# EAGLE board blmc_laurent (EAGLE 4.16)
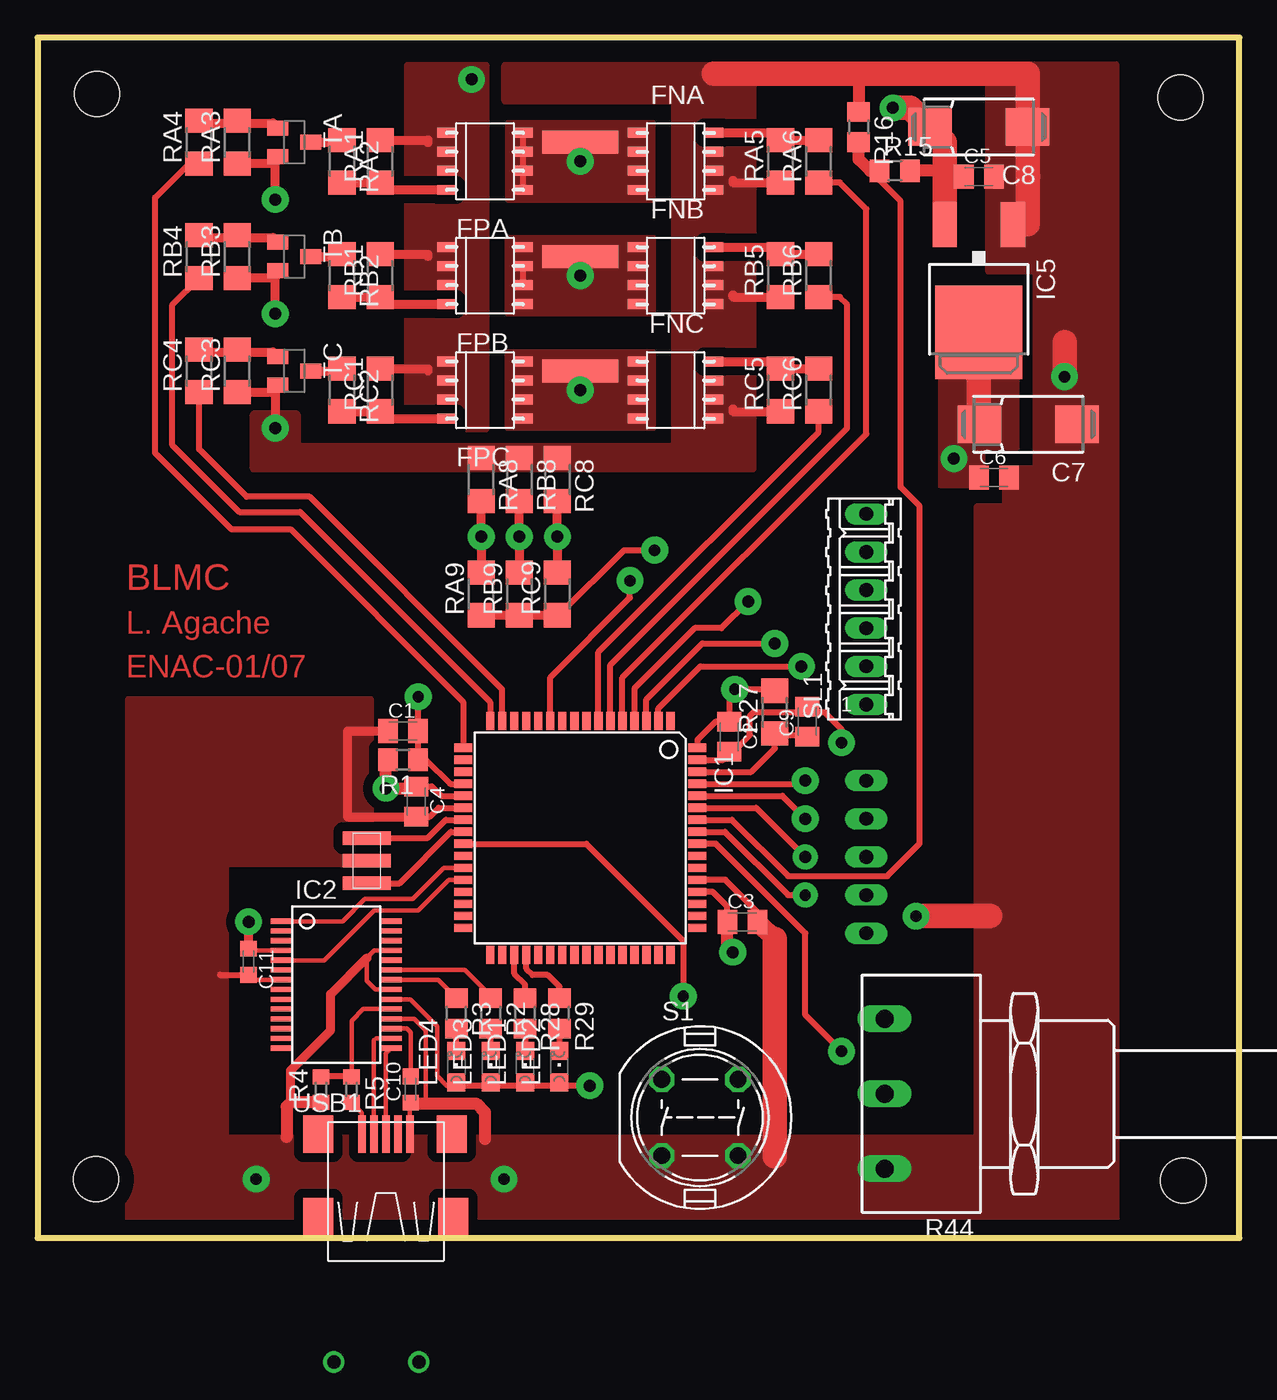
[diagram p0: board, top side]
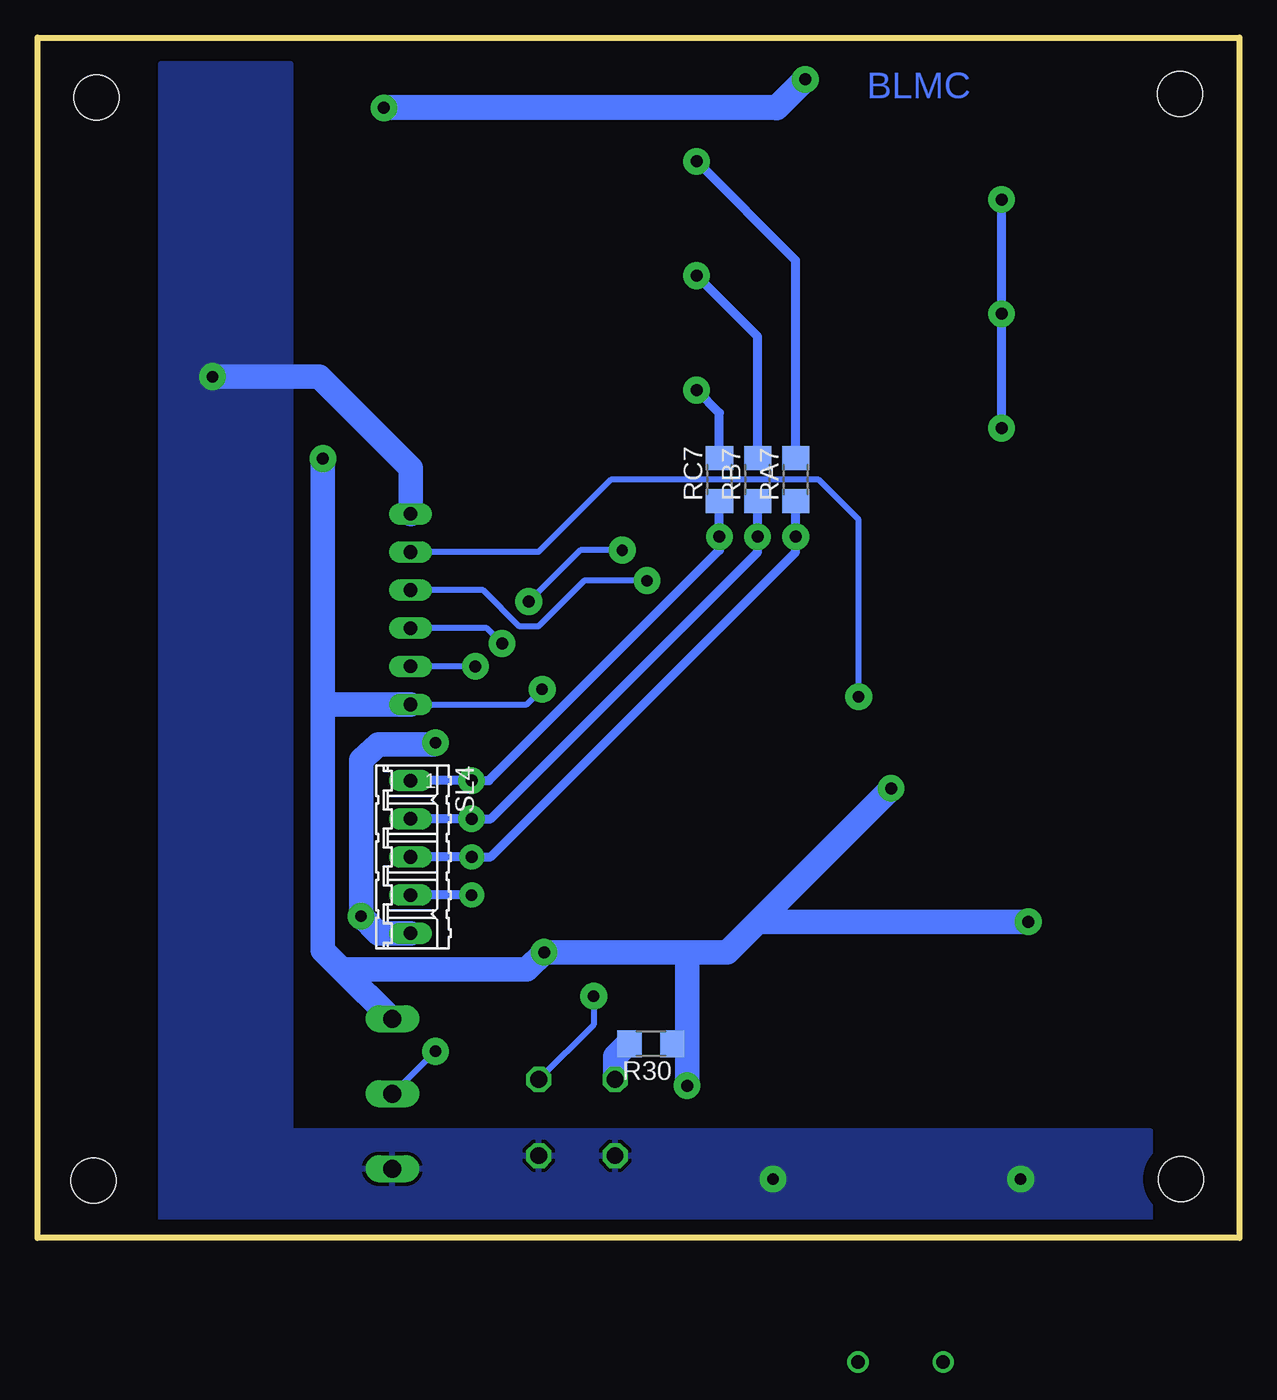
[diagram p1: board, bottom side, seen from below]

Size 80.06 x 80 mm. Coordinates in mm from the lower left corner, seen from the top.
Outline: 0,0 80.06,0 80.06,80 0,80 0,0
Copper layers (1*16): Top 0.035mm / dielectric 1.5mm / Bottom 0.035mm
Design rules "default": minimum track width 16mil, minimum drill 24mil, track to track 8mil, track to pad 8mil, pad to pad 8mil, via to via 8mil, smd to smd 8mil, copper to edge 40mil, drill to drill 8mil, minimum pad ring 10mil, minimum via ring 8mil, stop-mask expansion 4mil, vias tented up to drill 0mil, thermal gap 10mil
Holes 3 mm at 3.96,76.23 76.13,76 76.32,3.84 3.9,3.93

## Footprints (pad centres in the part's own frame; a part is rotated, then mirrored left to right if it is on the bottom)
C0805K = smd 1.3 x 1.6: 1 -1,0; 2 1,0
085CS_1AR = smd 2.9 x 2.5: + 3.25,0; - -3.25,0
C0603K = smd 1.05 x 1.08: 1 -0.875,0; 2 0.875,0
SOLDER_PAD_200_50 = smd 5.08 x 1.524: P$1 0,0
SO8 = smd 0.66 x 1.27: P$1 -0.635,-2.54; P$2 0.635,-2.54; P$3 1.905,-2.54; P$4 3.175,-2.54; P$5 3.175,2.54; P$6 1.905,2.54; P$7 0.635,2.54; P$8 -0.635,2.54
TQFP64 = smd 1.194 x 0.559: 1 -7.8,6; 2 -7.8,5.2; 3 -7.8,4.4; 4 -7.8,3.6; 5 -7.8,2.8; 6 -7.8,2; 7 -7.8,1.2; 8 -7.8,0.4; 9 -7.8,-0.4; 10 -7.8,-1.2; 11 -7.8,-2; 12 -7.8,-2.8; 13 -7.8,-3.6; 14 -7.8,-4.4; 15 -7.8,-5.2; 16 -7.8,-6; 33 7.8,-6; 34 7.8,-5.2; 35 7.8,-4.4; 36 7.8,-3.6; 37 7.8,-2.8; 38 7.8,-2; 39 7.8,-1.2; 40 7.8,-0.4; 41 7.8,0.4; 42 7.8,1.2; 43 7.8,2; 44 7.8,2.8; 45 7.8,3.6; 46 7.8,4.4; 47 7.8,5.2; 48 7.8,6 | smd 0.559 x 1.194: 17 -6,-7.8; 18 -5.2,-7.8; 19 -4.4,-7.8; 20 -3.6,-7.8; 21 -2.8,-7.8; 22 -2,-7.8; 23 -1.2,-7.8; 24 -0.4,-7.8; 25 0.4,-7.8; 26 1.2,-7.8; 27 2,-7.8; 28 2.8,-7.8; 29 3.6,-7.8; 30 4.4,-7.8; 31 5.2,-7.8; 32 6,-7.8; 49 6,7.8; 50 5.2,7.8; 51 4.4,7.8; 52 3.6,7.8; 53 2.8,7.8; 54 2,7.8; 55 1.2,7.8; 56 0.4,7.8; 57 -0.4,7.8; 58 -1.2,7.8; 59 -2,7.8; 60 -2.8,7.8; 61 -3.6,7.8; 62 -4.4,7.8; 63 -5.2,7.8; 64 -6,7.8
SSOP28DB = smd 0.348 x 1.397: 1 -4.225,-3.656; 2 -3.575,-3.656; 3 -2.925,-3.656; 4 -2.275,-3.656; 5 -1.625,-3.656; 6 -0.975,-3.656; 7 -0.325,-3.656; 8 0.325,-3.656; 9 0.975,-3.656; 10 1.625,-3.656; 11 2.275,-3.656; 12 2.925,-3.656; 13 3.575,-3.656; 14 4.225,-3.656; 15 4.225,3.656; 16 3.575,3.656; 17 2.925,3.656; 18 2.275,3.656; 19 1.625,3.656; 20 0.975,3.656; 21 0.325,3.656; 22 -0.325,3.656; 23 -0.975,3.656; 24 -1.625,3.656; 25 -2.275,3.656; 26 -2.925,3.656; 27 -3.575,3.656; 28 -4.225,3.656
DPACK = smd 1.6 x 3: 1 -2.28,-4.8; 3 2.28,-4.8 | smd 5.8 x 6.2: 4 0,2.38
CHIPLED_0805 = smd 1.2 x 1.2: A 0,-1.05; C 0,1.05
R0805 = smd 1.3 x 1.5: 1 -1.012,0; 2 1.012,0
R0603 = smd 1 x 1.1: 1 -0.85,0; 2 0.85,0
R1206 = smd 1.6 x 1.803: 1 -1.422,0; 2 1.422,0
PC16S = drill 1.2 long: 1A -5,6.5; 1E 5,6.5; 1S 0,6.5
DT6 = drill 1.118 octagon: 1 -2.54,2.54; 2 2.54,2.54; 3 2.54,-2.54; 4 -2.54,-2.54
06P = drill 0.914 long: 1 -6.35,0; 2 -3.81,0; 3 -1.27,0; 4 1.27,0; 5 3.81,0; 6 6.35,0
05P = drill 0.914 long: 1 -5.08,0; 2 -2.54,0; 3 0,0; 4 2.54,0; 5 5.08,0
SOT23 = smd 1 x 1.4: 1 -0.95,-1.1; 2 0.95,-1.1; 3 0,1.1
MICRO_CRYSTAL = smd 0.9 x 3.2: P$1 -1.5,0; P$2 0,0; P$3 1.5,0
USB-MB-S = smd 2.5 x 0.5: D+ 2.5,0; D- 2.5,0.8; GND 2.5,-1.6; ID 2.5,-0.8; VBUS 2.5,1.6 | smd 2.5 x 2: GND@1 -3,4.5; GND@2 2.5,4.5; GND@3 -3,-4.5; GND@4 2.5,-4.4 | drill 0.9 round: P$5 -12.7,3.47; P$6 -12.7,-2.2

## Placement (x,y rotation side)
C1  100nF  [C0805K]  24.35,33.78 0 top
C2  100nF  [C0805K]  46.06,33.4 270 top
C3  100nF  [C0805K]  46.95,21.08 0 top
C4  100nF  [C0805K]  25.23,29.08 270 top
C5  100nF  [C0805K]  62.7,70.73 0 top
C6  100nF  [C0805K]  63.72,50.67 0 top
C7  22uF  [085CS_1AR]  66,54.22 180 top
C8  22uF  [085CS_1AR]  62.7,74.04 180 top
C9  100nF  [C0805K]  51.27,34.41 90 top
C10  100nF  [C0603K]  24.85,9.9 90 top
C11  100nF  [C0603K]  14.06,18.41 270 top
CON_MA  SOLDER_PAD200_50  [SOLDER_PAD_200_50]  36.16,73.02 0 top
CON_MB  SOLDER_PAD200_50  [SOLDER_PAD_200_50]  36.16,65.4 0 top
CON_MC  SOLDER_PAD200_50  [SOLDER_PAD_200_50]  36.16,57.78 180 top
FNA  IRL7413  [SO8]  42.51,70.48 90 top
FNB  IRL7413  [SO8]  42.51,62.86 90 top
FNC  IRL7413  [SO8]  42.51,55.24 90 top
FPA  IRL7416  [SO8]  29.81,73.02 270 top
FPB  IRL7416  [SO8]  29.81,65.4 270 top
FPC  IRL7416  [SO8]  29.81,57.78 270 top
IC1  MEGA128-A  [TQFP64]  36.16,26.67 270 top
IC2  FT232RL  [SSOP28DB]  19.9,16.89 270 top
IC5  LM317MABDT  [DPACK]  62.7,62.73 180 top
LED1  [CHIPLED_0805]  32.47,11.43 0 top
LED2  [CHIPLED_0805]  34.76,11.43 0 top
LED3  [CHIPLED_0805]  30.19,11.43 0 top
LED4  [CHIPLED_0805]  27.9,11.43 0 top
R1  10K  [R0805]  24.35,31.87 180 top
R2  560  [R0805]  30.19,14.98 270 top
R3  560  [R0805]  27.9,14.98 270 top
R4  10K  [R0603]  18.89,9.9 90 top
R5  4K7  [R0603]  20.92,9.9 270 top
R15  22K  [R0805]  57.11,71.12 0 top
R16  10K  [R0805]  54.7,74.04 270 top
R27  0R  [R1206]  49.11,35.05 90 top
R28  560  [R0805]  32.47,14.98 270 top
R29  560  [R0805]  34.76,14.98 270 top
R30  10k  [R1206]  39.2,12.95 180 bottom
R44  PC16S  [PC16S]  62.92,9.62 90 top
RA1  680R  [R1206]  22.82,71.75 90 top
RA2  33R  [R1206]  20.28,71.75 270 top
RA3  47k  [R1206]  13.3,73.02 90 top
RA4  10k  [R1206]  10.76,73.02 90 top
RA5  47k  [R1206]  49.49,71.75 90 top
RA6  100R  [R1206]  52.03,71.75 90 top
RA7  10k  [R1206]  29.55,50.54 90 bottom
RA8  2k2  [R1206]  29.55,50.54 270 top
RA9  2k2  [R1206]  29.55,42.92 90 top
RB1  680R  [R1206]  22.82,64.13 90 top
RB2  33R  [R1206]  20.28,64.13 270 top
RB3  47k  [R1206]  13.3,65.4 90 top
RB4  10k  [R1206]  10.76,65.4 90 top
RB5  47k  [R1206]  49.49,64.13 90 top
RB6  100R  [R1206]  52.03,64.13 90 top
RB7  10k  [R1206]  32.09,50.54 90 bottom
RB8  2k2  [R1206]  32.09,50.54 270 top
RB9  2k2  [R1206]  32.09,42.92 90 top
RC1  680R  [R1206]  22.82,56.51 90 top
RC2  33R  [R1206]  20.28,56.51 270 top
RC3  47k  [R1206]  13.3,57.78 90 top
RC4  10k  [R1206]  10.76,57.78 90 top
RC5  47k  [R1206]  49.49,56.51 90 top
RC6  100R  [R1206]  52.03,56.51 90 top
RC7  10k  [R1206]  34.63,50.54 90 bottom
RC8  2k2  [R1206]  34.63,50.54 270 top
RC9  2k2  [R1206]  34.63,42.92 90 top
S1  DT6  [DT6]  44.13,8.03 0 top
SL1  [06P]  55.21,41.91 90 top
SL4  [05P]  55.21,25.39 270 bottom
TA  BC847  [SOT23]  17.11,73.02 270 top
TB  BC847  [SOT23]  17.11,65.4 270 top
TC  BC847  [SOT23]  17.11,57.78 270 top
U$1  MICRO_RESO  [MICRO_CRYSTAL]  21.93,25.14 90 top
USB1  USB-MB-S  [USB-MB-S]  23.2,4.44 90 top

## Library data of the parts
C1-C11 R1-R5 R15 R16 R27-R30 RA1-RA9 RB1-RB9 RC1-RC9 = rcl
CON_MA CON_MB CON_MC U$1 = paparazzi
FNA FNB FNC FPA FPB FPC = MY Fets
IC1 = atmel
IC2 = ftdichip
IC5 = v-reg
LED1-LED4 = led
R44 = piher
S1 = switch-misc
SL1 SL4 = con-amp-quick
TA TB TC = transistor-npn
USB1 = con-usb-2

## Nets
+5V: C2.1 C3.1 C4.1 C6.1 C7.+ C11.1 IC1.21 IC1.52 IC1.64 IC2.4 IC2.20 IC5.4 LED1.A LED2.A LED3.A LED4.A R1.2 R27.2 R30.1 R44.1E SL1.1
ADC0: IC1.61 RC7.1 RC8.2 RC9.2 SL4.1
ADC1: IC1.60 RB7.1 RB8.2 RB9.2 SL4.2
ADC2: IC1.59 RA7.1 RA8.2 RA9.2 SL4.3
ADC4: IC1.57 SL4.4
CMDE_BP: IC1.25 S1.2
CMDE_LED1: IC1.35 R28.1
CMDE_LED2: IC1.36 R29.1
COMP_AIN0: IC1.4 RA9.1 RB9.1 RC9.1
GND: C1.1 C2.2 C3.2 C4.2 C5.2 C6.2 C7.- C8.- C9.2 C10.1 C11.2 FNA.P$1 FNA.P$2 FNA.P$3 FNB.P$1 FNB.P$2 FNB.P$3 FNC.P$1 FNC.P$2 FNC.P$3 IC1.22 IC1.53 IC1.63 IC2.7 IC2.18 IC2.21 IC2.25 IC5.1 R4.1 R16.1 R44.1A RA3.1 RA5.1 RA8.1 RB3.1 RB5.1 RB8.1 RC3.1 RC5.1 RC8.1 S1.3 S1.4 SL1.6 SL4.5 TA.2 TB.2 TC.2 U$1.P$2 USB1.GND
MES_VBAT: IC1.58 R15.1 R16.2
MOT_A: CON_MA.P$1 FNA.P$5 FNA.P$6 FNA.P$7 FNA.P$8 FPA.P$5 FPA.P$6 FPA.P$7 FPA.P$8 RA7.2
MOT_B: CON_MB.P$1 FNB.P$5 FNB.P$6 FNB.P$7 FNB.P$8 FPB.P$5 FPB.P$6 FPB.P$7 FPB.P$8 RB7.2
MOT_C: CON_MC.P$1 FNC.P$5 FNC.P$6 FNC.P$7 FNC.P$8 FPC.P$5 FPC.P$6 FPC.P$7 FPC.P$8 RC7.2
N$1: IC1.24 U$1.P$1
N$2: IC1.23 U$1.P$3
N$3: R30.2 S1.1
N$4: RB3.2 RB4.2 TB.1
N$5: FNA.P$4 RA5.2 RA6.2
N$6: FNB.P$4 RB5.2 RB6.2
N$7: FPB.P$4 RB1.1 RB2.2
N$8: RB2.1 TB.3
N$9: RC3.2 RC4.2 TC.1
N$10: FNC.P$4 RC5.2 RC6.2
N$11: FPC.P$4 RC1.1 RC2.2
N$12: RC2.1 TC.3
N$13: IC1.56 R44.1S
N$14: C9.1 IC1.62 R27.1
N$16: LED1.C R28.2
N$17: LED2.C R29.2
N$20: IC2.15 USB1.D+
N$21: RA2.1 TA.3
N$24: IC2.16 USB1.D-
N$25: IC2.23 R2.1
N$26: IC2.22 R3.1
N$27: LED3.C R2.2
N$28: LED4.C R3.2
N$30: IC2.19 R4.2 R5.1
N$31: R5.2 USB1.VBUS
N$32: C10.2 IC2.17
N$34: FPA.P$4 RA1.1 RA2.2
N$35: USB1.GND@1
N$36: USB1.GND@3
N$48: RA3.2 RA4.2 TA.1
PDI: IC1.2 SL1.2
PDO: IC1.3 SL1.3
RESET: C1.2 IC1.20 R1.1 SL1.5
RX1: IC1.27 IC2.1
SCK: IC1.11 SL1.4
TMNA: IC1.5 RA6.1
TMNB: IC1.6 RB6.1
TMNC: IC1.7 RC6.1
TMPA: IC1.17 RA4.1
TMPB: IC1.16 RB4.1
TMPC: IC1.15 RC4.1
TX1: IC1.28 IC2.5
VBAT: C5.1 C8.+ FPA.P$1 FPA.P$2 FPA.P$3 FPB.P$1 FPB.P$2 FPB.P$3 FPC.P$1 FPC.P$2 FPC.P$3 IC5.3 R15.2 RA1.2 RB1.2 RC1.2

## Tracks (layer width: path | path; a pad name or v marks a point on that pad's centre or on a via)
+5V  (via drill 0.76 pad 1.78, 0.8 pad 1.78)
  Top 0.305: 14.06,19.43 14.07,19.41 | IC2.4 14.2,19.16 14.06,19.3 | IC2.20 24.81,15.91 26.63,14.09 26.63,10.79 27.27,10.16 27.9,10.16
  Top 0.406: IC1.21 26.88,29.46 26.25,30.09 25.23,30.09 C4.1 | 27.9,10.16 LED4.A 27.94,10.16 30.19,10.16 LED3.A 30.22,10.16 32.47,10.16 LED1.A 32.51,10.16 34.76,10.16 | 34.76,10.16 LED2.A | v36.79,10.16 34.76,10.16 | IC1.52 44.96,23.07 45.94,22.09 45.94,21.08 C3.1 | IC1.64 43.96,33.2 45.17,34.41 46.19,34.41 C2.1 46.06,36.19 v46.44,36.57 | v46.44,36.57 46.19,36.32 | R27.2 48.76,36.57 v46.44,36.57
  Top 0.61: C11.1 14.06,19.3 14.06,19.43 v14.06,21.08
  Top 0.813: R1.2 23.2,31.87 v23.2,29.97 25.23,29.97 C4.1 | C3.1 45.95,19.41 v46.32,19.05
  Top 1.626: C7.+ 62.7,54.22 IC5.4
  Bottom 0.406: SL1.1 47.46,35.56 v46.44,36.57
  Bottom 0.813: v46.32,19.05 46.83,19.17
  Bottom 1.626: 32.09,21.08 v23.2,29.97 | 32.09,21.08 34.12,19.05 36.79,19.05 | 36.79,19.05 v46.32,19.05 47.46,17.9 59.78,17.9 | 61.05,35.56 v61.05,51.94 | 61.05,35.56 SL1.1 | v14.06,21.08 32.09,21.08 | 36.79,19.05 36.79,12.95 | 36.79,12.95 v36.79,10.16 | 36.79,12.95 R30.1 | R44.1E 56.44,14.6 56.48,14.6 59.78,17.9 | 59.78,17.9 61.05,19.17 61.05,35.56
  pour Top (isolate 0.61, no thermals): 60.16,63.11 60.16,50.16 62.95,50.16 62.95,52.7 65.24,52.7 65.24,63.11
ADC0  (via drill 0.8 pad 1.78)
  Top 0.406: IC1.61 50.93,30.27 v51.14,30.47
  Top 0.61: RC7.1 v34.63,46.73 RC9.2
  Bottom 0.61: 55.33,30.47 | 55.33,30.47 SL4.1 v51.14,30.47 50,30.47 34.63,45.84 v34.63,46.73 RC7.1 34.63,49.14
ADC1  (via drill 0.8 pad 1.78)
  Top 0.406: IC1.60 49.61,29.46 v51.14,27.93
  Top 0.61: RB7.1 v32.09,46.73 RB9.2
  Bottom 0.61: 55.33,27.93 | 55.33,27.93 SL4.2 v51.14,27.93 49.87,27.93 32.09,45.72 v32.09,46.73 RB7.1 32.09,49.27
ADC2  (via drill 0.8 pad 1.65, 0.8 pad 1.78)
  Top 0.406: IC1.59 47.87,28.67 v51.14,25.39
  Top 0.61: v29.55,46.73 RA7.1 | v29.55,46.73 RA9.2 | v29.55,46.73 29.68,46.73
  Bottom 0.61: 29.55,49.14 RA7.1 v29.55,46.73 29.55,45.72 49.87,25.39 v51.14,25.39 SL4.3
ADC4  (via drill 0.76 pad 1.65)
  Top 0.406: IC1.57 45.79,27.07 50,22.86 v51.14,22.86
  Bottom 0.61: v51.14,22.86 SL4.4
CMDE_BP  (via drill 0.76 pad 1.78)
  Top 0.406: IC1.25 36.56,26.27 43.02,19.81 v43.02,16.12
  Bottom 0.406: S1.2 46.7,10.54 | S1.2 | S1.2 43.02,14.22 v43.02,16.12
CMDE_LED1
  Top 0.406: IC1.35 31.76,17.6 32.47,16.89 R28.1
CMDE_LED2
  Top 0.406: IC1.36 32.56,17.95 32.98,17.52 34,17.52 34.76,16.76 R29.1
COMP_AIN0  (via drill 0.76 pad 1.78, 0.8 pad 1.78)
  Top 0.406: IC1.4 39.76,36.61 43.78,40.64 45.55,40.64 v47.33,42.41 | RC9.1 34.73,41.5 39.08,45.84 v41.11,45.84
  Top 0.61: RA9.1 29.55,41.52 32.09,41.52 | RC9.1 34.63,41.52 32.09,41.52 | 32.09,41.52 RB9.1
  Bottom 0.406: v41.11,45.84 43.9,45.84 v47.33,42.41
GND  (via drill 0.76 pad 1.78, 0.8 pad 1.78)
  Top 0.305: C11.2 14.06,17.52 14.37,17.21 IC2.7 | IC2.18 25.1,14.61 25.87,13.84 25.87,8.96 | IC2.25 22.43,19.16 21.93,18.66 21.93,17.14 22.51,16.56 IC2.21 | C10.1 24.85,9.01 24.8,8.96 USB1.GND
  Top 0.406: IC1.22 26.73,28.67 26.12,28.06 25.23,28.06 C4.2 | IC1.53 45.81,23.86 47.97,21.71 47.97,21.08 C3.2 | IC1.63 45.67,31.86 46.19,32.38 C2.2 46.33,32.4 47.46,33.52 47.46,34.79 47.71,35.05 50.89,35.05 51.14,35.3 C9.2 51.27,35.05 52.41,35.05 53.56,33.9 v53.56,33.02 | C11.2 12.17,17.54 12.15,17.52
  Top 0.61: 15.84,71.75 arc90 16.01,71.92 | v15.84,69.21 15.84,71.75 | 15.84,64.13 arc90 16.01,64.3 | v15.84,61.59 15.84,64.13 | 15.84,56.51 arc90 16.01,56.68 | 15.84,56.51 v15.84,53.97 | RA5.1 46.32,70.33 46.32,70.48 | RB5.1 46.32,62.71 46.32,62.86 | RC5.1 46.32,55.09 46.32,55.24 | 15.84,71.75 16.01,71.92 | 16.01,71.92 TA.2 | RA3.1 15.68,71.6 15.84,71.75 | 15.84,64.13 16.01,64.3 | 16.01,64.3 TB.2 | RB3.1 15.68,63.98 15.84,64.13 | 15.84,56.51 16.01,56.68 | 16.01,56.68 TC.2 | RC3.1 15.68,56.36 15.84,56.51 | C1.1 20.66,33.78 20.66,28.06 25.23,28.06 | 21.93,18.66 19.52,16.25 19.52,13.84 16.85,11.17 16.85,9.14 16.89,9.1 16.89,9.05
  Top 0.813: 54.7,77.59 R16.1 | R4.1 16.89,9.05 16.6,8.76 16.6,6.73 | 24.8,8.96 25.87,8.96 29.22,8.96 29.81,8.38 29.81,6.6
  Top 1.219: 49.11,19.92 C3.2
  Top 1.626: 45.05,77.59 54.7,77.59 65.95,77.59 C8.- 65.95,70.73 | IC5.1 64.98,67.56 65.95,67.56 65.95,70.73 | 65.95,70.73 66,70.73 | v68.41,57.4 68.41,59.69 | 49.11,5.46 49.11,19.92 | v58.51,21.46 63.46,21.46
  Bottom 0.61: v15.84,53.97 v15.84,61.59 v15.84,69.21
  Bottom 1.626: SL1.6 55.21,51.3 61.3,57.4 v68.41,57.4 | SL4.5 57.37,20.32 v58.51,21.46 58.51,31.87 57.37,32.89 53.68,32.89 v53.56,33.02
  other vias: 14.57,3.93 31.08,3.93
  pour Top (isolate 0.61, no thermals): 31.2,78.1 47.59,78.1 47.59,51.3 14.44,51.3 14.44,54.86 17.23,54.86 17.23,52.7 42.51,52.7 42.51,75.81 31.2,75.81
  pour Top (isolate 0.61, no thermals): 62.57,48.76 64.48,48.76 64.48,51.3 66.51,51.3 66.51,64.38 63.34,64.38 63.34,78.23 71.84,78.23 71.84,0.88 6.06,0.88 6.06,35.94 22.19,35.94 22.19,24.89 12.54,24.89 12.54,6.73 62.57,6.73
  pour Bottom (isolate 0.406): 5.93,7.11 63.21,7.11 63.21,78.23 71.84,78.23 71.84,0.63 5.93,0.5
MES_VBAT
  Top 0.406: IC1.58 46.26,27.86 50,24.13 56.6,24.13 58.76,26.28 58.76,48.76 57.49,50.03 57.49,69.08 56.1,70.48 R15.1
  Top 0.813: R16.2 54.7,71.88 55.46,71.12 R15.1
MOT_A  (via drill 0.8 pad 1.78)
  Top 0.406: FPA.P$8 FPA.P$7 FPA.P$6 FPA.P$5
  Bottom 0.61: v36.16,71.75 29.55,65.15 RA7.2
  pour Top (isolate 0.61, no thermals): 31.33,74.29 31.33,69.21 40.98,69.21 40.98,74.29
MOT_B  (via drill 0.8 pad 1.78)
  Top 0.406: FPB.P$6 FPB.P$7
  Bottom 0.61: RB7.2 32.09,60.07 v36.16,64.13
  pour Top (isolate 0.61, no thermals): 31.33,66.67 40.98,66.67 40.98,61.59 31.33,61.59
MOT_C  (via drill 0.8 pad 1.78)
  Bottom 0.61: RC7.2 34.63,54.99 v36.16,56.51
  pour Top (isolate 0.61, no thermals): 31.33,59.05 40.98,59.05 40.98,53.97 31.33,53.97
N$1
  Top 0.406: IC1.24 27.54,27.07 24.12,23.64 U$1.P$1
N$2
  Top 0.406: IC1.23 27.2,27.86 26,26.67 21.93,26.67 21.93,26.66 U$1.P$3
N$3
  Bottom 1.626: R30.2 40.73,12.95 41.59,12.09 S1.1
N$4
  Top 0.61: TB.1 15.69,66.67 13.3,66.67 RB3.2 13.14,66.67 10.76,66.67 RB4.2
N$5
  Top 0.61: FNA.P$4 49.49,73.66 RA5.2 | RA5.2 RA6.2 | RA5.2 49.49,73.02
N$6
  Top 0.61: FNB.P$4 49.49,66.04 RB5.2 | RB5.2 RB6.2 | RB5.2 49.49,65.4
N$7
  Top 0.61: RB1.1 22.82,62.86 | FPB.P$4 22.82,62.23 RB1.1 | RB1.1 RB2.2 20.28,62.86
N$8
  Top 0.61: RB2.1 20.28,65.4 TB.3
N$9
  Top 0.61: TC.1 15.69,59.05 13.3,59.05 RC3.2 13.14,59.05 10.76,59.05 RC4.2
N$10
  Top 0.61: FNC.P$4 49.49,58.42 RC5.2 | RC5.2 RC6.2 | RC5.2 49.49,57.78
N$11
  Top 0.61: RC1.1 22.82,55.24 | FPC.P$4 22.82,54.61 RC1.1 | RC1.1 RC2.2 20.28,55.24
N$12
  Top 0.61: RC2.1 20.28,57.78 TC.3
N$13  (via drill 0.76 pad 1.78)
  Top 0.406: IC1.56 45.19,26.27 51.14,20.32 51.14,14.85 v53.56,12.44
  Bottom 0.406: R44.1S 56.39,9.65 56.35,9.65 v53.56,12.44
N$14
  Top 0.406: IC1.62 47.54,31.07 49.11,32.63 R27.1 | R27.1 49.11,33.65 | C9.1 51.14,33.52 49.21,33.52 R27.1
N$16
  Top 0.406: R28.2 LED1.C
N$17
  Top 0.406: 34.76,12.19 LED2.C R29.2
N$20
  Top 0.305: 23.56,12.67 23.58,12.7 | 23.56,12.67 IC2.15 | 23.56,12.67 23.2,12.31 USB1.D+
N$21
  Top 0.61: RA2.1 20.28,73.02 TA.3
N$22  (via drill 0.76 pad 1.78)
  other vias: 3.9,76.2
N$23  (via drill 0.76 pad 1.78)
  other vias: 3.9,3.93
N$24
  Top 0.305: IC2.16 22.55,13.31 22.44,13.2 22.4,13.16 USB1.D-
N$25
  Top 0.305: R2.1 30.19,16.12 28.45,17.86 IC2.23
N$26
  Top 0.305: R3.1 26.69,17.21 IC2.22
N$27
  Top 0.406: LED3.C R2.2
N$28
  Top 0.406: 27.9,12.19 LED4.C R3.2
N$29  (via drill 0.76 pad 1.78)
  other vias: 76.29,3.81
N$30
  Top 0.305: IC2.19 21.71,15.26 20.92,14.47 R5.1 20.92,10.66
  Top 0.406: 20.96,10.79 21.04,10.79 | 20.96,10.79 R5.1 | R4.2 18.92,10.79 20.96,10.79
N$31
  Top 0.305: R5.2 20.92,9.01 21.55,8.38 21.6,8.33 USB1.VBUS
N$32
  Top 0.305: IC2.17 24.6,13.96 24.85,13.71 C10.2
N$33  (via drill 0.76 pad 1.78)
  other vias: 76.16,75.94
N$34
  Top 0.61: FPA.P$4 22.82,69.84 RA1.1 RA2.2 20.28,70.48
N$48
  Top 0.61: TA.1 15.69,74.29 13.3,74.29 RA3.2 13.14,74.29 10.76,74.29 RA4.2
PDI  (via drill 0.8 pad 1.78)
  Top 0.406: IC1.2 41.36,35.29 44.16,38.09 v50.89,38.09
  Bottom 0.406: v50.89,38.09 SL1.2
PDO  (via drill 0.8 pad 1.78)
  Top 0.406: v49.11,39.62 44.29,39.62 40.56,35.89 IC1.3
  Bottom 0.406: SL1.3 50.13,40.64 v49.11,39.62
RESET  (via drill 0.76 pad 1.78)
  Top 0.406: IC1.20 27.48,30.27 25.87,31.87 R1.1 | R1.1 | R1.1 25.35,31.89 C1.2 25.35,36.05 v25.36,36.06
  Bottom 0.406: SL1.5 46.7,45.72 41.87,50.54 28.03,50.54 25.36,47.87 v25.36,36.06
RX1
  Top 0.305: IC1.27 27.05,24.67 24.98,22.6 21.81,22.6 20.32,21.11 IC2.1
SCK  (via drill 0.76 pad 1.78)
  Top 0.406: IC1.11 34.16,37.36 39.46,42.67 v39.46,43.81
  Bottom 0.406: SL1.4 50.38,43.17 47.97,40.76 46.7,40.76 43.65,43.81 v39.46,43.81
TMNA
  Top 0.406: RA6.1 53.45,70.33 55.21,68.58 55.21,53.59 38.96,37.34 IC1.5
TMNB
  Top 0.406: RB6.1 53.45,62.71 53.94,62.23 53.94,53.97 38.16,38.19 IC1.6
TMNC
  Top 0.406: 52.03,55.24 RC6.1 52.03,53.72 37.36,39.04 IC1.7
TMPA
  Top 0.406: RA4.1 10.1,71.6 7.84,69.34 7.84,52.32 12.92,47.24 16.85,47.24 28.36,35.73 IC1.17
TMPB
  Top 0.406: RB4.1 8.98,62.2 8.98,52.83 13.42,48.38 17.49,48.38 30.16,35.71 IC1.16
TMPC
  Top 0.406: IC1.15 30.96,36.56 18.12,49.4 13.93,49.4 10.76,52.57 RC4.1 10.76,56.38
TX1
  Top 0.305: IC2.5 19.11,18.51 22.44,21.84 25.36,21.84 27.39,23.86 IC1.28
VBAT  (via drill 0.8 pad 1.78)
  Top 0.61: RA1.2 26,73.17 26,73.02 | RB1.2 26,65.55 26,65.4 | RC1.2 26,57.93 26,57.78
  Top 0.813: 60.41,70.73 60.42,70.73 C5.1 | 60.42,71.12 R15.2
  Top 1.626: v56.98,75.31 58.13,75.31 59.45,73.98 | 59.45,73.98 C8.+ | IC5.3 60.42,70.73 60.42,71.12 60.42,73.01 59.45,73.98
  Bottom 1.676: v28.92,77.21 30.82,75.31 v56.98,75.31
  pour Top (isolate 0.61, no thermals): 29.81,78.1 29.81,53.97 24.73,53.97 24.73,78.1

## Text on the board
Top: BLMC | L. Agache | ENAC-01/07
Bottom: BLMC